# Altium PCB esp32-s3_connect_lcd.PcbDoc
Units mil, origin at the board's own origin, x right, y up, seen from the top; angles counter-clockwise.
Board outline 1025 x 440 mil, 2 copper layers (Top Layer, Bottom Layer); 7 components, 13 nets, 42 pads, 8 vias.
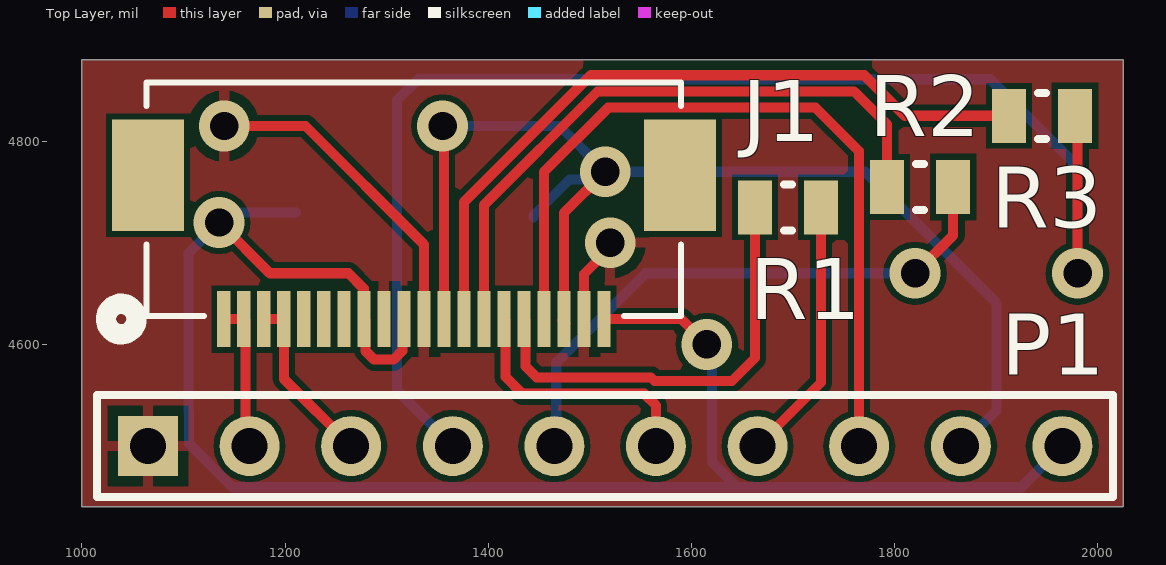
[diagram p0: Top Layer view]
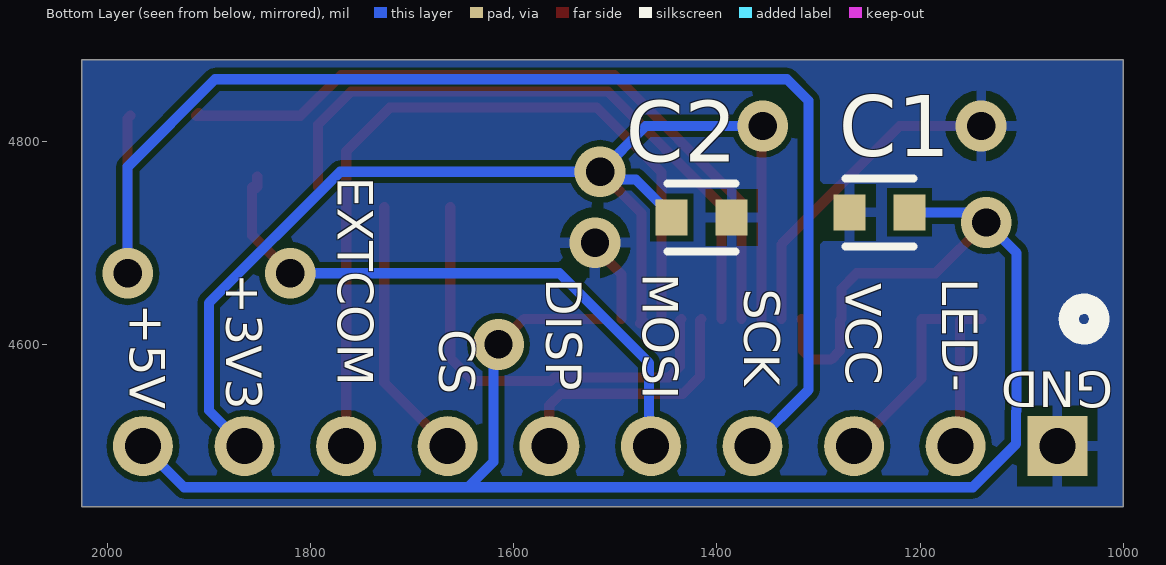
[diagram p1: Bottom Layer view, seen from below]

## Layer stack, top to bottom
Top Solder: solder mask 0.4, Solder Resist, Dk 3.5
Top Layer: signal copper 1.4
Dielectric 1: dielectric 12.6, FR-4, Dk 4.8
Bottom Layer: signal copper 1.4
Bottom Solder: solder mask 0.4, Solder Resist, Dk 3.5

## Board outline
1000,4440 2025,4440 2025,4880 1000,4880

## Design rules (kind name [scope] priority, off if disabled: settings)
Clearance [All] p1: gap=5.98 ignorepadtopadclearanceinfootprint=FALSE
MinimumSolderMaskSliver [All] p1: minsoldermaskwidth=0.98
PolygonConnect [All] p1: connectstyle=Relief reliefconductorwidth=10 reliefentries=4 polygonreliefangle="90 Angle" airgapwidth=10
RoutingVias [All] p1: holewidth=28 width=50 viastyle="Through Hole" minholewidth=28 minwidth=50 maxholewidth=28 maxwidth=50
SilkToSolderMaskClearance [IsPad] p1: minsilkscreentomaskgap=5 clearancetoexposedcopper=TRUE
SolderMaskExpansion [All] p1: expansion=4
Width [All] p1: maxlimit=12.01 minlimit=5.98 preferedwidth=10
28 further rules are at their usual default settings.

## Components (designator, comment, footprint, x,y, rotation, side; value= is the part's Value field where it differs from the comment)
C1 "100 nF" FP-CC0603-DA-MFG 1240,4730 r0 bottom
C2 "100 nF" FP-CC0603-DA-MFG 1415,4725 r180 bottom
J1 "FH12-20S-0.5SH(55)" CONN20_FH12-20S_HIR 1139.65,4625 r180 top
P1 "Header 10" HDR1X10 1065,4500 r0 top
R1 "0Ω" RESC2013X50X30LL20T20 1695,4735 r180 top value=0O
R2 "0Ω" RESC2013X50X30LL20T20 1825,4755 r180 top value=0O
R3 "0Ω" RESC2013X50X30LL20T20 1945,4825 r180 top value=0O

## Footprints (in the part's own frame and the unit in brackets; to place one, negate y for a bottom-side part, rotate by r counter-clockwise, add the part's x,y. Pads: shape width x height; smd on the part's side, far side on the other; paste and mask are expansions set on the pad)
CONN20_FH12-20S_HIR [mil]
  rect 13x55 smd paste+0 mask+0: 1(0,0) 2(-19.69,0) 3(-39.38,0) 4(-59.07,0) 5(-78.76,0) 6(-98.45,0) 7(-118.14,0) 8(-137.83,0) 9(-157.52,0) 10(-177.21,0) 11(-196.9,0) 12(-216.59,0) 13(-236.28,0) 14(-255.97,0) 15(-275.66,0) 16(-295.35,0) 17(-315.04,0) 18(-334.73,0) 19(-354.42,0) 20(-374.11,0)
  rect 71x110 smd paste-55 mask-55: 21(-448.87,-141.57) 22(74.76,-141.57)
  silkscreen extent -450,-233 116,15, body extent -421,-137 51,-2, height 43
FP-CC0603-DA-MFG [mm]
  rect 0.8x0.9 smd paste+0 mask+0: 1(-0.75,0) 2(0.75,0)
  silkscreen extent -0.85,-0.85 0.85,0.85, body extent -0.8,-0.4 0.8,0.4, height 0.9
HDR1X10 [mm] "Connector; Header; 10 Position"
  rect 1.5x1.5 hole 0.9: 1(0,0)
  round 1.5 hole 0.9: 2(2.54,0) 3(5.08,0) 4(7.62,0) 5(10.16,0) 6(12.7,0) 7(15.24,0) 8(17.78,0) 9(20.32,0) 10(22.86,0)
  silkscreen extent -1.27,-1.27 24.13,1.27
RESC2013X50X30LL20T20 [mm] "Chip Resistor, 2-Leads, Body 2.00x1.25mm, IPC High Density"
  rect 0.85x1.35 smd: 1(-0.825,0) 2(0.825,0)
  silkscreen extent -0.1,-0.58 0.1,0.58, body extent -1.1,-0.72 1.1,0.72, height 0.5

## Part data
C1 C2: library part CMP-2100-03601-2, "50V 100nF X7R ±10% 0603 Multilayer Ceramic Capacitors MLCC - SMD/SMT ROHS", LCSC Part #=C14663, Manufacturer=YAGEO, Mfr. Part #=CC0603KRX7R9BB104, Package=0603, ComponentLink2Description=Datasheet, ComponentLink2URL=http://www.yageo.com/documents/recent/UPY-GPHC_X7R_6.3V-to-50V_18.pdf, Datasheet=https://datasheet.lcsc.com/lcsc/2211101700_YAGEO-CC0603KRX7R9BB104_C14663.pdf
J1: library part FH12-20S-0.5SH55, "-40?~+85? Clamshell 20P Bottom Contact Surface Mount,Right Angle 0.5mm SMD,P=0.5mm,Surface Mount,Right Angle FFC/FPC Connectors ROHS", LCSC Part #=C596730, Manufacturer=HRS(Hirose), Package="SMD,P=0.5mm,Surface Mount,Right Angle", Datasheet=https://datasheet.lcsc.com/lcsc/2102241735_HRS-Hirose-FH12-20S-0-5SH-55_C596730.pdf, Mfr. Part #=FH12-20S-0.5SH(55)
P1: "Header, 10-Pin", LatestRevisionDate=17-Jul-2002, LatestRevisionNote="Re-released for DXP Platform.", Publisher="Altium Limited"
R1 R2 R3: library part CMP-2001-04896-1, "125mW Thick Film Resistors 200V 0O 0805 Chip Resistor - Surface Mount ROHS", LCSC Part #=C844934, Manufacturer="Vishay Intertech", Mfr. Part #=CRCW08050000Z0EA, Package=0805, Datasheet="Vishay Dale"

## Via types
v1: diameter 50, hole 28, Top Layer to Bottom Layer, 8 vias

## Nets (pads, with @x,y where several pads share a name; then routed paths per layer and width w, separated by ;. In a path a pad name is that pad's centre, name@x,y a point inside that pad or via, vN(x,y) a via of type N, cw(c..) or ccw(c..) an arc to the next point about the centre after c; other vN are vias at no path point)
+3V3: C2.1 J1.12 J1.18 P1.9 | length 1221.5
  Top Layer w10: v1(1355,4815) 1356.24,4813.76 J1.12 ; J1.18@1475.88,4620.5 1472.88,4623.5 J1.18 1474.38,4729.38 v1(1515,4770)
  Bottom Layer w10: v1(1355,4815) 1470,4815 v1(1515,4770) ; C2.1 1444.53,4726.97 1479.91,4762.35 1507.35,4762.35 v1(1515,4770) ; P1.9 1900,4535 1900,4640.89 1770.89,4770 v1(1515,4770)
+5V: C1.1 J1.8 J1.10 J1.20 P1.10 | length 1777.9
  Top Layer w10: v1(1135,4720) 1185,4670 1262.32,4670 1277.48,4654.84 J1.8 1278.98,4623.5 1278.98,4593.66 1287.64,4585 1306.7,4585 1315.36,4593.66 1315.36,4623.5 J1.10 ; J1.20 1590,4625 v1(1615,4600) ; P1.10@1963.18,4501.82 P1.10
  Bottom Layer w10: C1.1 1145,4730 v1(1135,4720) 1105,4690 1105,4534.59 1105.51,4534.08 1105.51,4502.2 1148.22,4459.49 1645,4459.49 ; v1(1615,4600) 1620,4595 1620,4484.49 1645,4459.49 ; P1.10 1924.49,4459.49 1645,4459.49
GND: C1.2 C2.2 J1.9 J1.11 J1.19 P1.1 | length 404
  Top Layer w10: v1(1140,4815) 1220,4815 1336.55,4698.45 J1.11 ; J1.19 1494.07,4669.36 1520,4695.29 v1(1520,4700)
LCD_CS: P1.7 R1.1 | length 260.9
  Top Layer w10: P1.7 1727.48,4562.48 R1.1
LCD_DISP: J1.15 P1.6 | length 257.3
  Top Layer w10: J1.15 1416.81,4623.5 1416.81,4568.19 1433.48,4551.52 1553.48,4551.52 1565,4540 P1.6
LCD_EXTCOM: J1.17 P1.8 | length 789.1
  Top Layer w10: J1.17 1454.69,4769.69 1518.03,4833.03 1721.97,4833.03 1764.8,4790.2 1764.8,4500.2 P1.8
LCD_MOSI: P1.5 R2.1 | length 586.3
  Top Layer w10: v1(1820,4670) 1857.48,4707.48 R2.1 ; R2.1@1852.48,4765 1852.48,4755.16 R2.1@1855.06,4752.58
  Bottom Layer w10: P1.5 1466.82,4501.82 1466.82,4581.82 1555,4670 v1(1820,4670)
LCD_SCK: P1.4 R3.1 | length 1338.1
  Top Layer w10: R3.1 1980,4822.48 v1(1980,4670)
  Bottom Layer w10: P1.4 1310,4555 1310,4840 1330.98,4860.98 1894.02,4860.98 1980,4775 v1(1980,4670)
LED-: J1.1 J1.2 P1.2 | length 147
  Top Layer w10: J1.1 J1.2 1160.84,4623.5 1160.84,4504.16 P1.2
NetJ1_13: J1.13 R3.2 | length 723.5
  Top Layer w10: J1.13 1375.93,4740.04 1500.89,4865 1770,4865 1810,4825 R3.2 R3.2@1910,4827.52
NetJ1_14: J1.14 R2.2 | length 630.3
  Top Layer w10: J1.14 1395.62,4737.13 1507.51,4849.02 1760,4849.02 1792.52,4816.5 R2.2
NetJ1_16: J1.16 R1.2 | length 436.9
  Top Layer w10: J1.16 1436.5,4623.5 1436.5,4578.5 1447.49,4567.51 1560.1,4567.51 1563.59,4564.02 1639.9,4564.02 1662.52,4586.63 R1.2
VCC: J1.3 J1.4 P1.3 | length 172.1
  Top Layer w10: J1.3 J1.4 1198.72,4566.28 P1.3
pads on no net: J1.5 J1.6 J1.7 J1.21 J1.22

## Polygon pours and split planes (outlines as drawn)
GND on Top Layer "GND_L01_P004" (solid, pour order 4): 1000,4440 2025,4440 2025,4880 1000,4880
GND on Bottom Layer "GND_L02_P005" (solid, pour order 5): 1000,4440 2025,4440 2025,4880 1000,4880

## Silkscreen, mask and mechanical layers (free items; w line width, h text height)
Bottom Overlay:
  text "EXTCOM" at 1785,4765 h60 r90
  text "MOSI" at 1485,4670 h60 r90
  text "+3V3" at 1895,4670 h60 r90
  text "LED-" at 1190,4665 h60 r90
  text "DISP" at 1580,4665 h60 r90
  text "VCC" at 1285,4660 h60 r90
  text "SCK" at 1385,4655 h60 r90
  text "+5V" at 1990,4640 h60 r90
  text "CS" at 1685,4615 h60 r90
  text "GND" at 1010,4585 h60 r180
Mechanical 1:
  lines w10: 1002.14,4910 1002.14,4930 ; 1062.14,4900 1002.14,4920 ; 1062.14,4940 1002.14,4920 ; 1389.28,4920 1002.14,4920 ; 1640,4920 2027.14,4920 ; 1967.14,4900 2027.14,4920 ; 1967.14,4940 2027.14,4920 ; 2027.14,4910 2027.14,4930 ; 2049.82,4498.05 2069.82,4438.05 ; 2049.82,4818.05 2069.82,4878.05 ; 2059.82,4438.05 2079.82,4438.05 ; 2059.82,4878.05 2079.82,4878.05 ; 2069.82,4545 2069.82,4438.05 ; 2069.82,4771.1 2069.82,4878.05 ; 2089.82,4498.05 2069.82,4438.05 ; 2089.82,4818.05 2069.82,4878.05 ; 1000,4440 1000,4880 2025,4880 2025,4440 1000,4440
  text "1025 (mil)" at 1399.28,4894.82 h60
  text "440 (mil)" at 2095,4555 h60 r90